# Altium PCB PCB.PcbDoc
Units mil, origin at the board's own origin, x right, y up, seen from the top; angles counter-clockwise.
Board outline 1499.97 x 1454.44 mil, 2 copper layers (Top Layer, Bottom Layer); 30 components, 23 nets, 104 pads, 0 vias.
Unrouted connection lines stored in the file: 13.
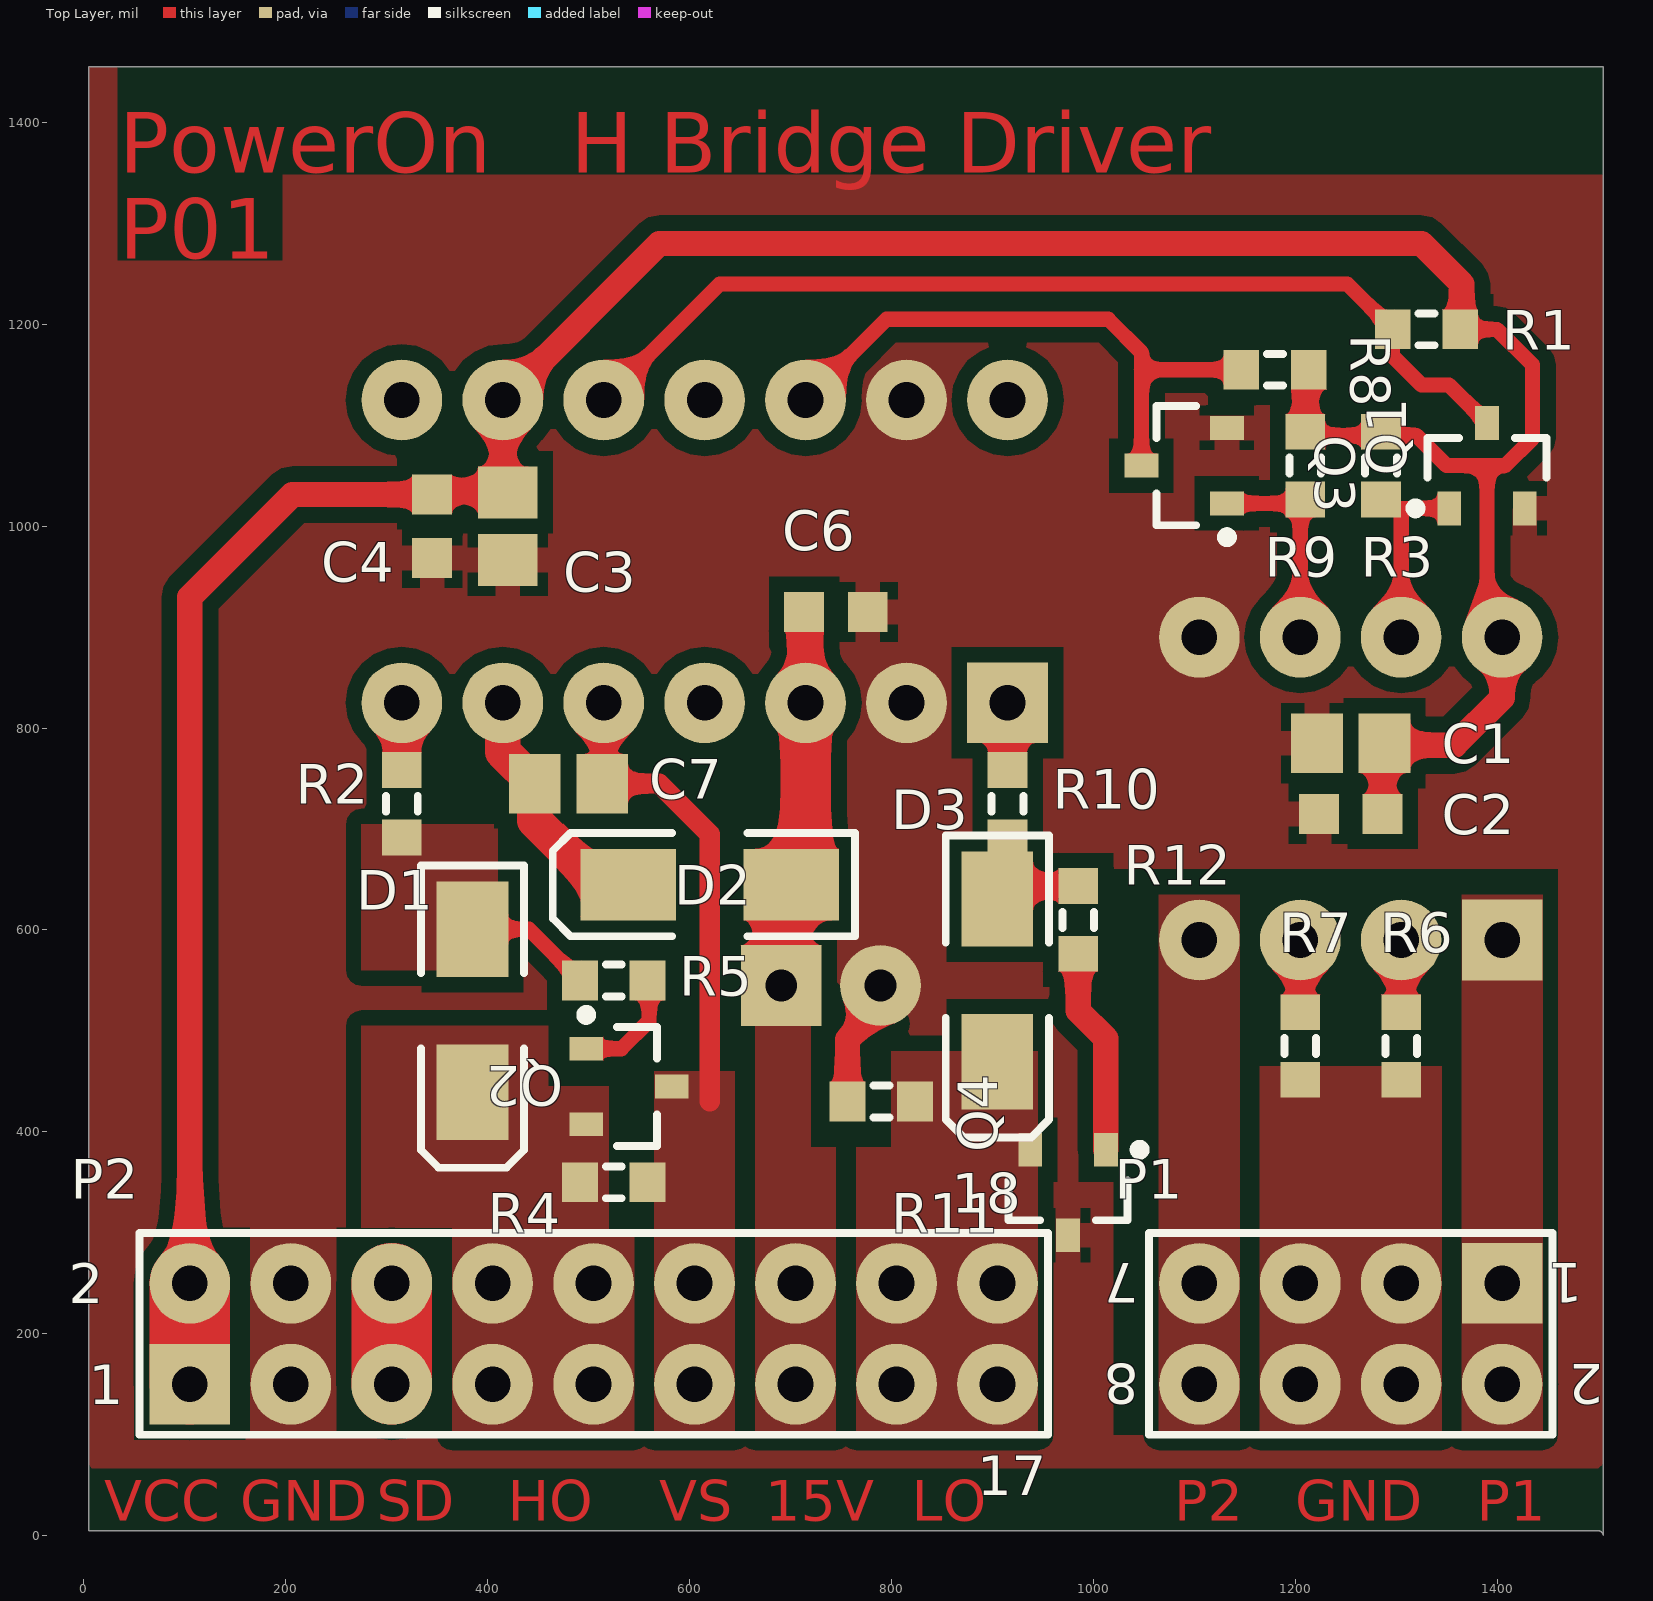
[diagram p0: Top Layer view]
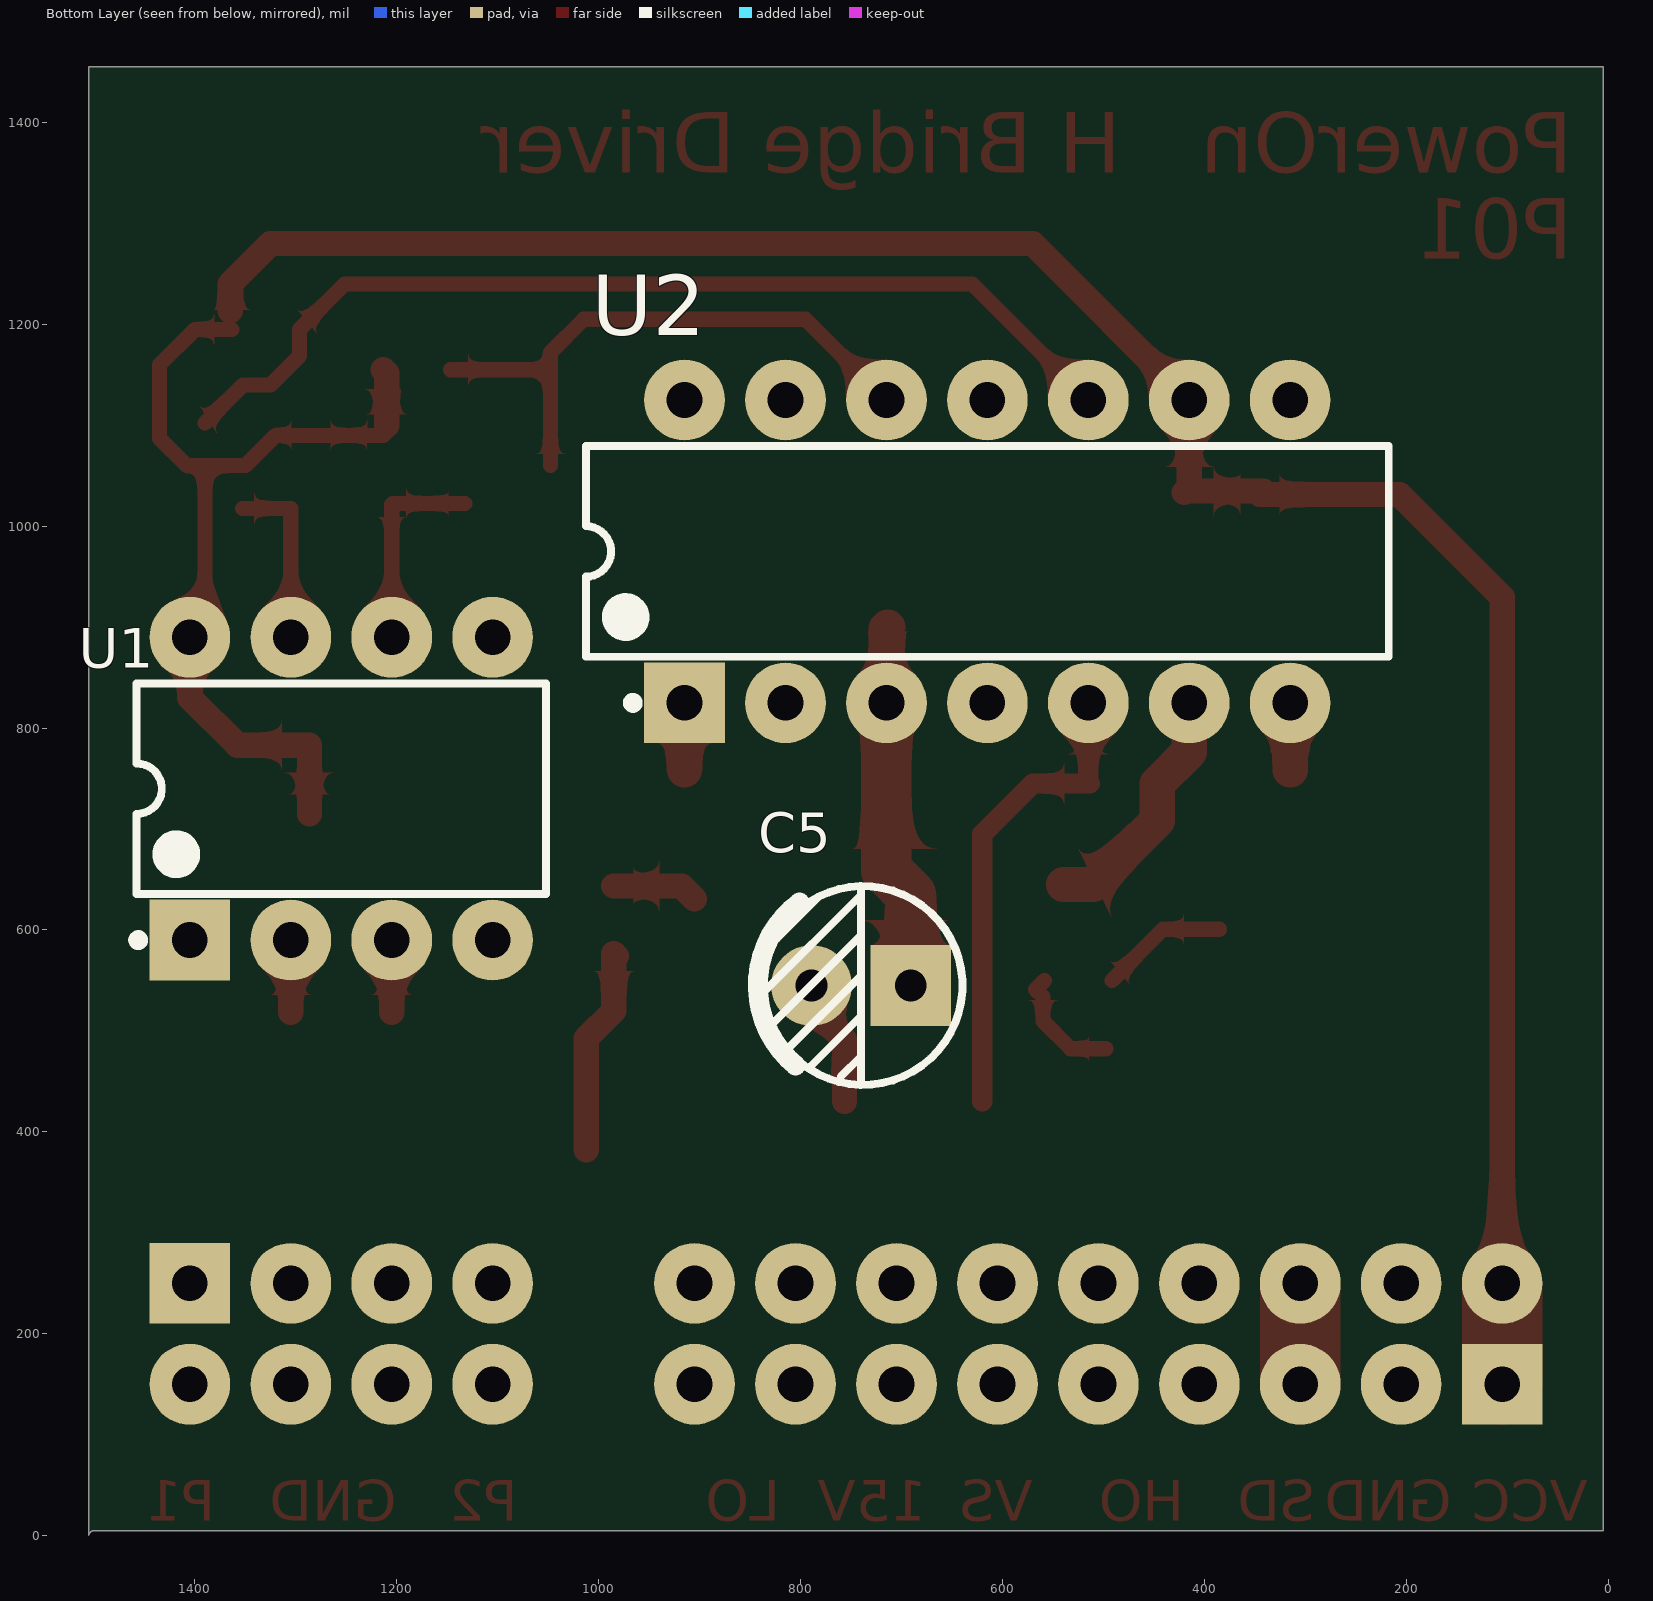
[diagram p1: Bottom Layer view, seen from below]

## Layer stack, top to bottom
Top Solder: solder mask 0.4, Solder Resist, Dk 3.5
Top Layer: signal copper 1.4
Dielectric 1: dielectric 12.6, FR-4, Dk 4.8
Bottom Layer: signal copper 1.4
Bottom Solder: solder mask 0.4, Solder Resist, Dk 3.5

## Board outline
5.02,5.01 1500,5.01 cw(c1500,0) 1504.99,0.55 1504.99,1454.98 5.02,1454.98

## Design rules (kind name [scope] priority, off if disabled: settings)
Clearance [All] p1: gap=15 ignorepadtopadclearanceinfootprint=TRUE except(2: Fill-Text Poly-Text Region-Text)
ComponentClearance [All] p1: gap=0 collisioncheckmode=3 verticalgap=0 showdistances=FALSE
PolygonConnect [All] p1: thpad.connectstyle=Direct thpad.reliefconductorwidth=25 thpad.reliefentries=4 thpad.polygonreliefangle="90 Angle" thpad.airgapwidth=10 smdpad.connectstyle=Relief smdpad.reliefconductorwidth=25 smdpad.reliefentries=4 smdpad.polygonreliefangle="90 Angle" smdpad.airgapwidth=10 via.connectstyle=Relief via.reliefconductorwidth=25 via.reliefentries=4 via.polygonreliefangle="90 Angle" via.airgapwidth=10
RoomDefinition Sch [InComponentClass('Sch')] p1: confinementstyle=ConfineIn formatcopy=TRUE lockcomponents=FALSE outline -2690,-115 9215,-115 9215,3895 -2690,3895
RoutingVias [All] p1: holewidth=28 width=50 viastyle="Through Hole" minholewidth=28 minwidth=50 maxholewidth=28 maxwidth=50
SolderMaskExpansion [All] p1: expansion=4
Width [All] p1: maxlimit=80 minlimit=15 preferedwidth=15
29 further rules are at their usual default settings.

## Components (designator, comment, footprint, x,y, rotation, side; value= is the part's Value field where it differs from the comment)
C1 "Cap" CAP0805 1255,785 r180 top value=10u
C2 "Cap" CAP0603 1255,715 r180 top value=100n
C3 "Cap" CAP0805 420,1000 r270 top value=10u
C4 "Cap" CAP0603 345,1000 r270 top value=100n
C5 "Cap" "CAP 2.5*5*11" 740,545 r0 bottom value=33u
C6 "Cap" CAP0603 745,915 r0 top value=100n
C7 "Cap" CAP0805 480,745 r0 top value=2.2u
D1 "Diode" DIODE_SMA 385,520 r0 top
D2 "Diode" DIODE_SMA 620,645 r270 top
D3 "Diode" DIODE_SMA 905,550 r0 top
P1 "Header 4X2" HDR2X4 1405,250 r180 top
P2 "Header 9X2" HDR2X9 105,150 r0 top
Q1 "NPN" BJT 1390,1060 r90 top
Q2 "PNP" BJT 540,445 r0 top
Q3 "NPN" BJT 1090,1060 r180 top
Q4 "PNP" BJT 975,340 r270 top
R1 "2k" RES0603 1330,1195 r0 top
R2 "10" RES0603 315,725 r90 top
R3 "470" RES0603 1285,1060 r270 top
R4 "33k" RES0603 525,350 r0 top
R5 "1k" RES0603 525,550 r0 top
R6 "470" RES0603 1305,485 r90 top
R7 "470" RES0603 1205,485 r90 top
R8 "2k" RES0603 1180,1155 r0 top
R9 "470" RES0603 1210,1060 r270 top
R10 "10" RES0603 915,725 r90 top
R11 "33k" RES0603 790,430 r180 top
R12 "1k" RES0603 985,610 r270 top
U1 "HCPL2630" DIP-8 1255,740 r90 bottom
U2 "IR2110" DIP-14 615,975 r90 bottom

## Footprints (in the part's own frame and the unit in brackets; to place one, negate y for a bottom-side part, rotate by r counter-clockwise, add the part's x,y. Pads: shape width x height; smd on the part's side, far side on the other; paste and mask are expansions set on the pad)
BJT [mm]
  rect 0.85x0.6 smd: 1(1.075,0) 2(-1.075,0.95) 3(-1.075,-0.95)
  silkscreen extent -1.2,-1.5 0.7,1.92, body extent -0.7,-1.5 0.7,1.5, height 1.14
CAP0603 [mm]
  rect 1x1 smd: 1(-0.8,0) 2(0.8,0)
  body extent -0.87,-0.48 0.87,0.48, height 0.85
CAP0805 [mm]
  rect 1.3x1.5 smd: 1(-0.85,0) 2(0.85,0)
  body extent -1.1,-0.72 1.1,0.72, height 1.1
"CAP 2.5*5*11" [mil] "脚距2.5mm直径5mm高度11mm"
  rect 80x80 hole 31.5: 1(-49.21,0)
  round 80 hole 31.5: 2(49.21,0)
  silkscreen extent -100,-98 102,98, body extent -98,-98 99,98, height 434
DIODE_SMA [mm]
  rect 1.8x2.4 smd: 1(0,2.05) 2(0,-2.05)
  silkscreen extent -1.3,-3.95 1.3,3.65
DIP-8 [mil] "DIP; 8 Leads; Row Spacing 7.62 mm; Pitch 2.54 mm"
  rect 80x80 hole 35.43: 1(-150,150)
  round 80 hole 35.43: 2(-150,50) 3(-150,-50) 4(-150,-150) 5(150,-150) 6(150,-50) 7(150,50) 8(150,150)
  silkscreen extent -155,-203 104,206, body extent -142,-203 142,203, height 200
DIP-14 [mil] "DIP; 14 Leads; Row Spacing 7.62 mm; Pitch 2.54 mm"
  rect 80x80 hole 35.43: 1(-150,300)
  round 80 hole 35.43: 2(-150,200) 3(-150,100) 4(-150,0) 5(-150,-100) 6(-150,-200) 7(-150,-300) 8(150,-300) 9(150,-200) 10(150,-100) 11(150,0) 12(150,100) 13(150,200) 14(150,300)
  silkscreen extent -155,-398 104,398, body extent -142,-398 142,398, height 200
HDR2X4 [mil] "Connector; Header; 4x2 Position"
  rect 80x80 hole 35.43: 1(0,0)
  round 80 hole 35.43: 2(0,100) 3(100,0) 4(100,100) 5(200,0) 6(200,100) 7(300,0) 8(300,100)
  silkscreen extent -50,-50 350,150
HDR2X9 [mil] "Connector; Header; 9x2 Position"
  rect 80x80 hole 35.43: 1(0,0)
  round 80 hole 35.43: 2(0,100) 3(100,0) 4(100,100) 5(200,0) 6(200,100) 7(300,0) 8(300,100) 9(400,0) 10(400,100) 11(500,0) 12(500,100) 13(600,0) 14(600,100) 15(700,0) 16(700,100) 17(800,0) 18(800,100)
  silkscreen extent -50,-50 850,150
RES0603 [mm]
  rect 0.9x1 smd: 1(-0.85,0) 2(0.85,0)
  silkscreen extent -0.2,-0.4 0.2,0.4, body extent -0.85,-0.48 0.85,0.48, height 0.6

## Part data
C1 C2 C3 C4 C5 C6 C7: "Capacitor", LatestRevisionDate=17-Jul-2002, LatestRevisionNote="Re-released for DXP Platform.", PackageReference=RAD-0.3, Published=8-Jun-2000, Publisher="Altium Limited"
D1 D2 D3: "Default Diode", Code_JEDEC=DO-214-AB, LatestRevisionDate=17-Jul-2002, LatestRevisionNote="Re-released for DXP Platform.", PackageReference=SMC, PackageVersion=Sep-1996, Published=8-Jun-2000, Publisher="Altium Limited"
P1: "Header, 4-Pin, Dual row", LatestRevisionDate=17-Jul-2002, LatestRevisionNote="Re-released for DXP Platform.", Publisher="Altium Limited"
P2: "Header, 9-Pin, Dual row", LatestRevisionDate=17-Jul-2002, LatestRevisionNote="Re-released for DXP Platform.", Publisher="Altium Limited"
Q1 Q3: "NPN Bipolar Transistor", Code_JEDEC=TO-226-AA, LatestRevisionDate=17-Jul-2002, LatestRevisionNote="Re-released for DXP Platform.", PackageReference=TO-226, Published=8-Jun-2000, Publisher="Altium Limited"
Q2 Q4: "PNP Bipolar Transistor", LatestRevisionDate=29-May-2009, LatestRevisionNote="IPC-7351 Footprint Added.", PackageDescription="3-Pin SOT-23 Package 0.95 mm Pitch, 2.4 mm Lead Span", PackageReference=SOT-23B, PackageVersion=Aug-1999, Published=8-Jun-2000, Publisher="Altium Limited"
R1 R2 R3 R4 R5 R6 R7 R8 R9 R10 R11 R12: library part Res1, "Resistor", LatestRevisionDate=17-Jul-2002, LatestRevisionNote="Re-released for DXP Platform.", PackageReference=AXIAL-0.3, Published=8-Jun-2000, Publisher="Altium Limited"

## Nets (pads, with @x,y where several pads share a name; then routed paths per layer and width w, separated by ;. In a path a pad name is that pad's centre, name@x,y a point inside that pad or via, vN(x,y) a via of type N, cw(c..) or ccw(c..) an arc to the next point about the centre after c; other vN are vias at no path point)
+15V: C5.1 C6.1 D2.1 P2.13 P2.14 U2.3 | length 365.6
  Top Layer w35: C6.1@713.5,900 715,898.5 U2.3
  Top Layer w50: C5.1 690.79,635.08 D2.1 715,659.29 U2.3
GND: C1.2 C2.2 C3.2 C4.2 C5.2 C6.2 P2.3 P2.4 Q1.3 Q3.3 Q4.1 R11.2 U1.5 U2.2 U2.13 | length 128.5
  Top Layer w25: R11.2 756.54,491.54 789.21,524.21 C5.2
GND1: P1.3 P1.4 P1.5 P1.6 R6.1 R7.1
HO: D1.2 P2.7 P2.8 P2.9 P2.10 Q2.3 R4.1
LO: D3.2 P2.15 P2.16 P2.17 P2.18 Q4.3 R11.1
NetC7_1: C7.1 D2.2 U2.6 | length 248.6
  Top Layer w35: U2.6 415,776.54 C7.1 446.54,708.46 510,645 D2.2
NetD1_1: D1.1 R2.1 R5.1 | length 127.5
  Top Layer w15: D1.1 440.83,600.71 R5.1
NetD3_1: D3.1 R10.1 R12.1 | length 85.3
  Top Layer w25: D3.1 917.76,643.46 R12.1
NetQ1_1: Q1.1 R1.1 U2.10 | length 995.2
  Top Layer w15: U2.10 630,1240 1251.54,1240 R1.1 1296.54,1168.46 1325,1140 1352.32,1140 Q1.1
NetQ1_2: Q1.2 R3.2 U1.7 | length 175.3
  Top Layer w15: U1.7 1305,1017.68 Q1.2
NetQ2_2: Q2.2 R5.2 | length 120.5
  Top Layer w15: Q2.2 532.4,482.4 560,510 560,533.82 567.32,541.14 R5.2
NetQ3_1: Q3.1 R8.1 U2.12 | length 590.4
  Top Layer w15: U2.12 795,1205 1014.72,1205 1047.68,1172.05 1047.68,1155 ; Q3.1 1047.68,1155 ; R8.1 1047.68,1155
NetQ3_2: Q3.2 R9.2 U1.6 | length 204.7
  Top Layer w15: Q3.2 1203.94,1022.6 1205,1021.54 U1.6
NetQ4_2: Q4.2 R12.2 | length 209
  Top Layer w25: R12.2@982.6,574.13 R12.2 985,520 1012.4,492.6 Q4.2
NetR2_2: R2.2 U2.7 | length 66.5
  Top Layer w35: R2.2 U2.7
NetR6_2: R6.2 U1.2 | length 71.5
  Top Layer w25: R6.2 U1.2
NetR7_2: R7.2 U1.3 | length 71.5
  Top Layer w25: R7.2 U1.3
NetR10_2: R10.2 U2.1 | length 66.5
  Top Layer w35: R10.2 U2.1
SHDN: P2.5 P2.6 U2.11 | length 100
  Top Layer w80: P2.5 P2.6
SPWM1: P1.1 P1.2 U1.1
SPWM2: P1.7 P1.8 U1.4
VCC: C1.1 C2.1 C3.1 C4.1 P2.1 P2.2 R1.2 R3.1 R8.2 R9.1 U1.8 U2.9 | length 3200
  Top Layer w15: R9.1 1213.46,1090 1320,1090 1350,1060 1390,1060 ; R1.2 1400,1195 1435,1160 1435,1086.96 1408.04,1060 1390,1060 ; R1.2@1365,1213.46 R1.2@1367.29,1213.46 ; U1.8 1390,905 1390,1060
  Top Layer w25: P2.2 105,930 206.5,1031.5 C4.1 ; C4.1@341.5,1035 C3.1@418.46,1035 ; C3.1 C3.1@418.46,1035 ; R9.1@1210,1100 1210,1151.54 R8.2 ; C2.1 1286.5,783.03 1358.03,783.03 1405,830 U1.8 ; R1.2@1365,1213.46 1365,1240 1325,1280 570,1280 U2.9 415,1038.46 C3.1@418.46,1035
  Top Layer w80: P2.1 P2.2
VS: C7.2 P2.11 P2.12 Q2.1 R4.2 U2.5 | length 472.9
  Top Layer w20: U2.5 515,746.54 C7.2 570,745 620,695 620,430
pads on no net: U2.4 U2.8 U2.14

## Polygon pours and split planes (outlines as drawn)
GND on Top Layer "GND_L01_P372" (solid, remove dead copper, pour order 372): 5,5 1505,5 1505,1455 5,1455
HO on Top Layer "HO_L01_P366" (solid, remove dead copper, pour order 366): 365,100 545,100 545,300 520,300 520,445 460,445 460,505 275,505 275,305 365,305
LO on Top Layer "LO_L01_P070" (solid, remove dead copper, pour order 70): 765,100 945,100 945,480 800,480 800,385 765,385
VS on Top Layer "VS_L01_P058" (solid, remove dead copper, pour order 58): 565,100 645,100 645,460 565,460
GND on Top Layer "GND_L01_P072" (solid, remove dead copper, pour order 72): 250,100 165,100 165,305 250,305
GND1 on Top Layer "GND1_L01_P068" (solid, remove dead copper, pour order 68): 1165,100 1345,100 1345,465 1165,465
SPWM1 on Top Layer "SPWM1_L01_P064" (solid, remove dead copper, pour order 64): 1365,100 1445,100 1445,635 1365,635
SPWM2 on Top Layer "SPWM2_L01_P062" (solid, remove dead copper, pour order 62): 1065,100 1145,100 1145,635 1065,635
+15V on Top Layer "+15V_L01_P060" (solid, remove dead copper, pour order 60): 665,100 745,100 745,385 720,385 720,550 665,550
GND on Top Layer "GND_L01_P042" (solid, remove dead copper, pour order 42): 365,250
HO on Top Layer "HO_L01_P018" (solid, remove dead copper, pour order 18): 465,275
NetD1_1 on Top Layer "NETD1_1_L01_P004" (solid, remove dead copper, pour order 4): 275,480
NetD1_1 on Top Layer "NETD1_1_L01_P002" (solid, remove dead copper, pour order 2): 275,705 410,705 410,560 275,560

## Other copper
Top Layer:
  pour cut-out: 5,5 8,8 8,66.99 1503.01,66.99 1505,65 1505,5
  pour cut-out: 125,100 365,100 365,305 125,305
  pour cut-out: 1460,660 1460,100 1020,100 1020,660
  pour cut-out: 1150,115
  text "PowerOn   H Bridge Driver" at 35,1350 h60
  text "P01" at 35,1265 h60
  text "VCC" at 20,15 h40
  text "GND" at 155,15 h40
  text "SD" at 290,15 h40
  text "HO" at 420,15 h40
  text "VS" at 570,15 h40
  text "15V" at 675,15 h40
  text "LO" at 820,15 h40
  text "P2" at 1080,15 h40
  text "GND" at 1200,15 h40
  text "P1" at 1380,15 h40

## Silkscreen, mask and mechanical layers (free items; w line width, h text height)
Mechanical 15:
  lines w10: 0,0 0,0 ; 0,0 0,1455 1510,1455 1510,0 1500,0 0,0

## Text inside footprints (layer, text, board x,y; h text height)
P1: Top Overlay "2" at 1505,170 h39.37 r180; Top Overlay "1" at 1485,270 h39.37 r180; Top Overlay "7" at 1045,270 h39.37 r180; Top Overlay "8" at 1045,170 h39.37 r180
P2: Top Overlay "18" at 860,320 h39.37; Top Overlay "17" at 885,40 h39.37; Top Overlay "1" at 5,130 h39.37; Top Overlay "2" at -15,230 h39.37